# Altium PCB dev-board.PcbDoc
Units mm, origin at the board's own origin, x right, y up, seen from the top; angles counter-clockwise.
Board outline 320 x 150 mm, 2 copper layers (Top Layer, Bottom Layer); 200 components, 128 nets, 764 pads, 0 vias.
Unrouted connection lines stored in the file: 345.
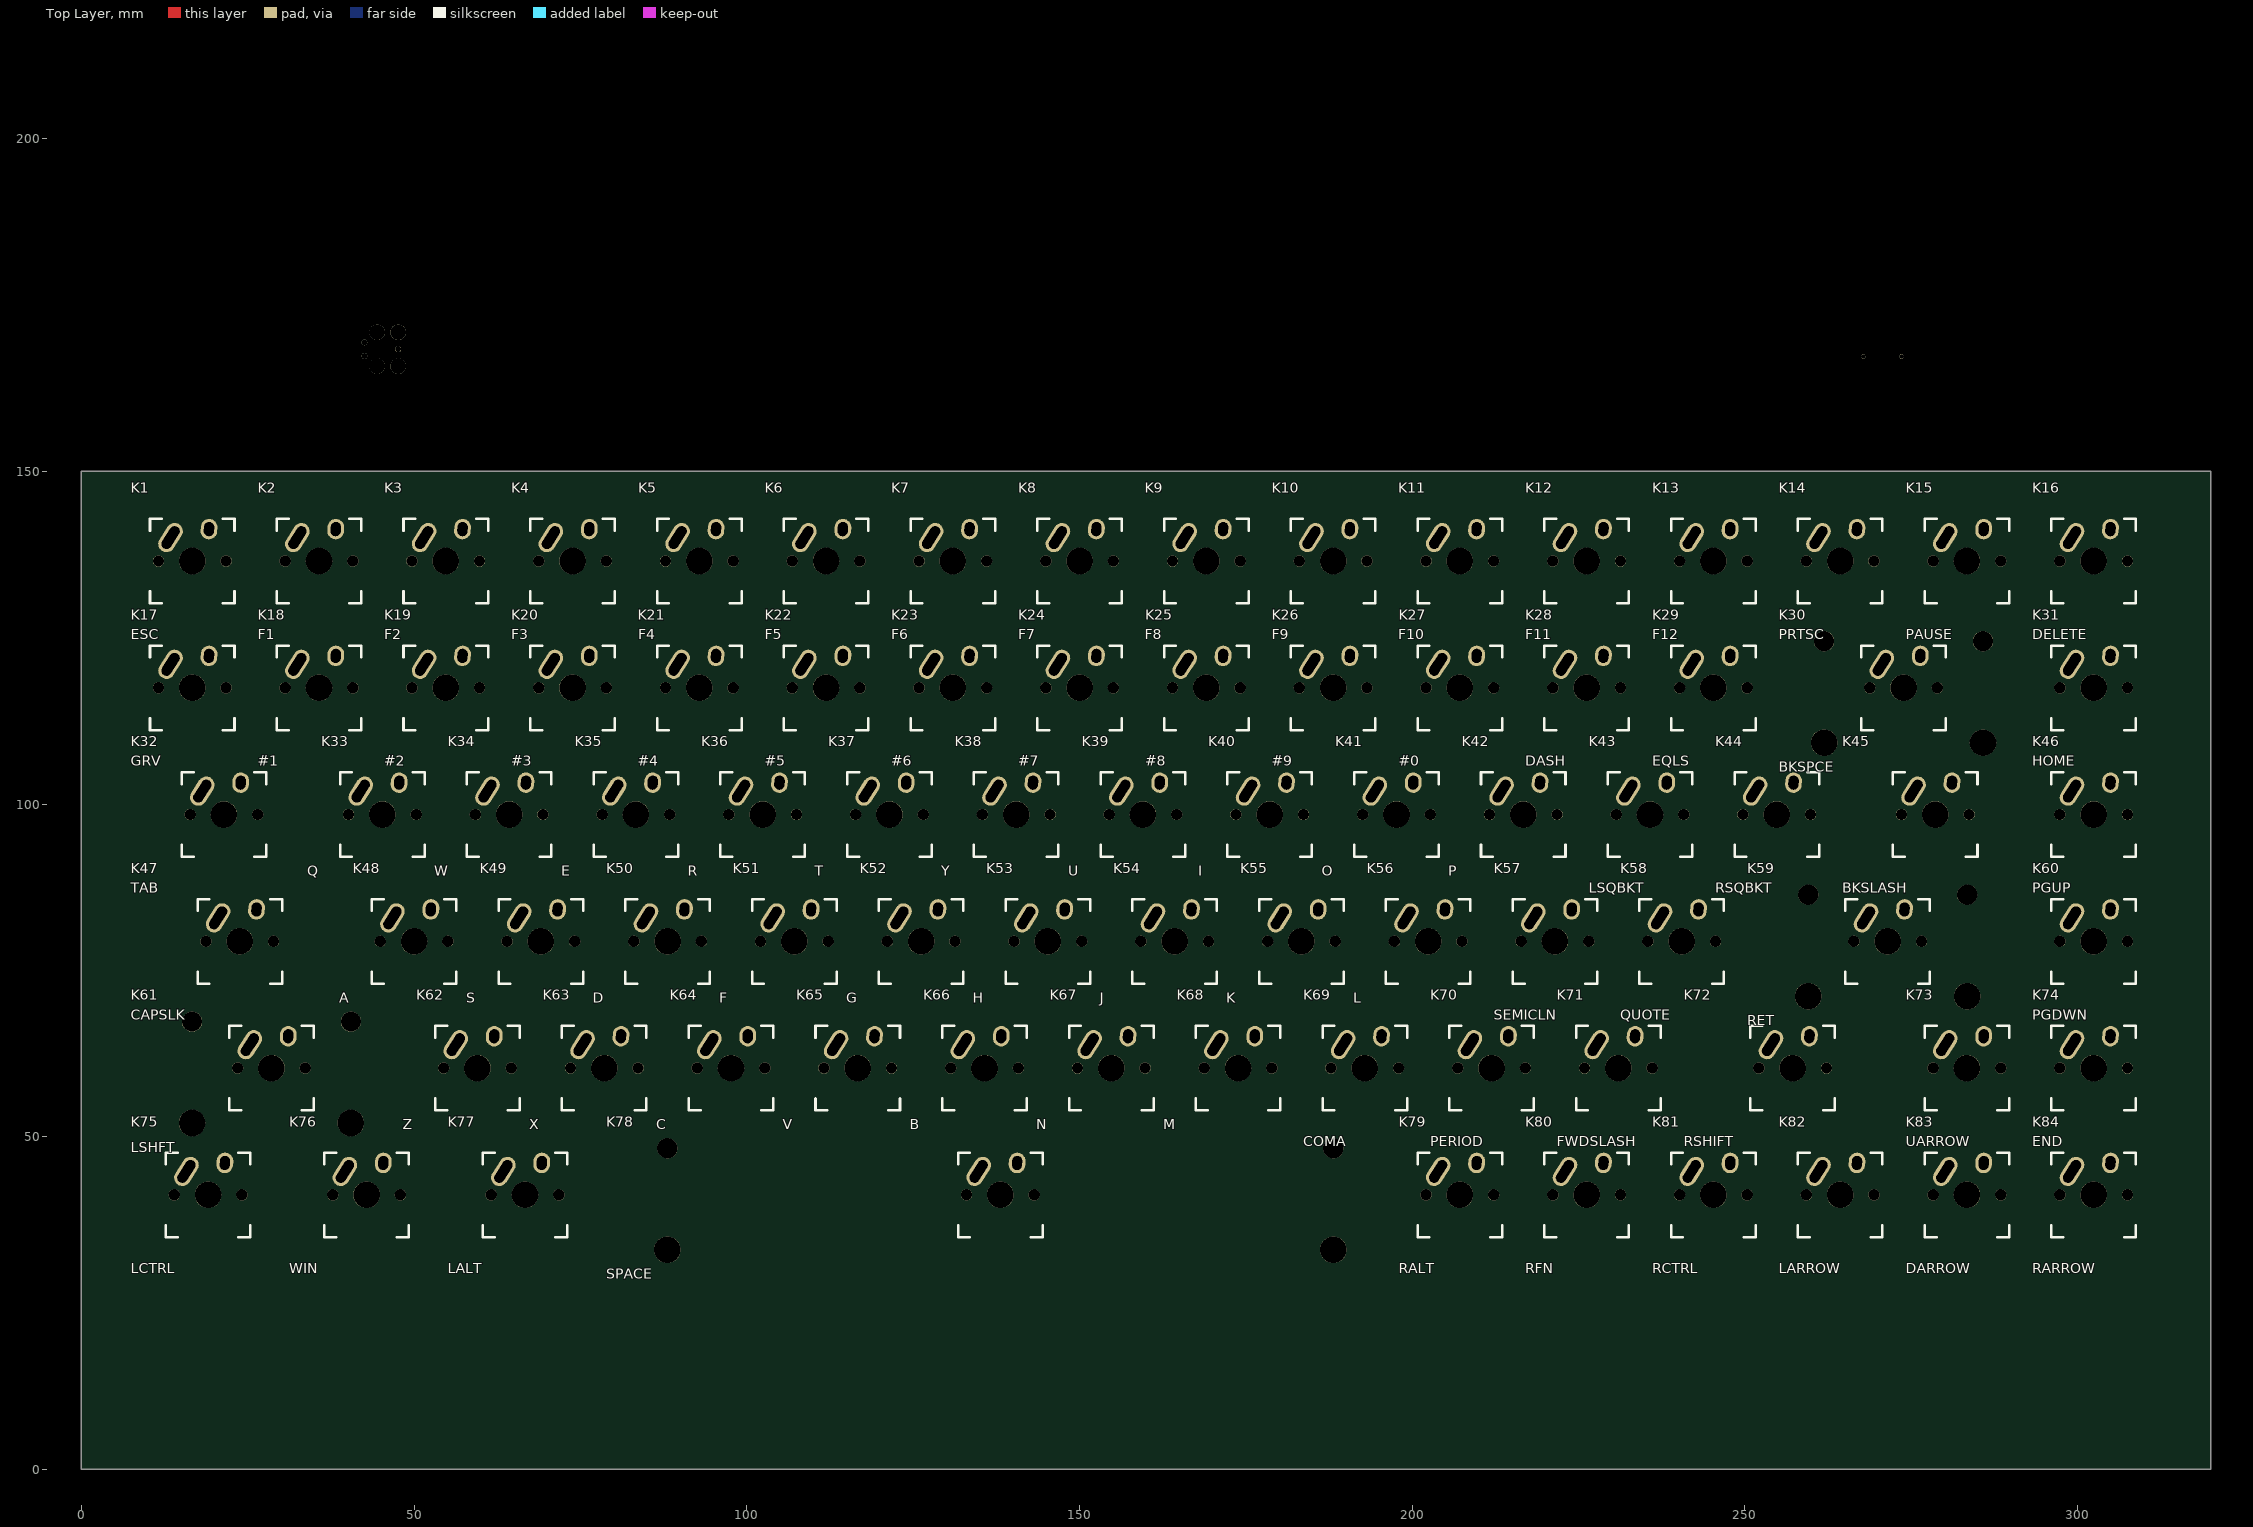
[diagram p0: Top Layer view]
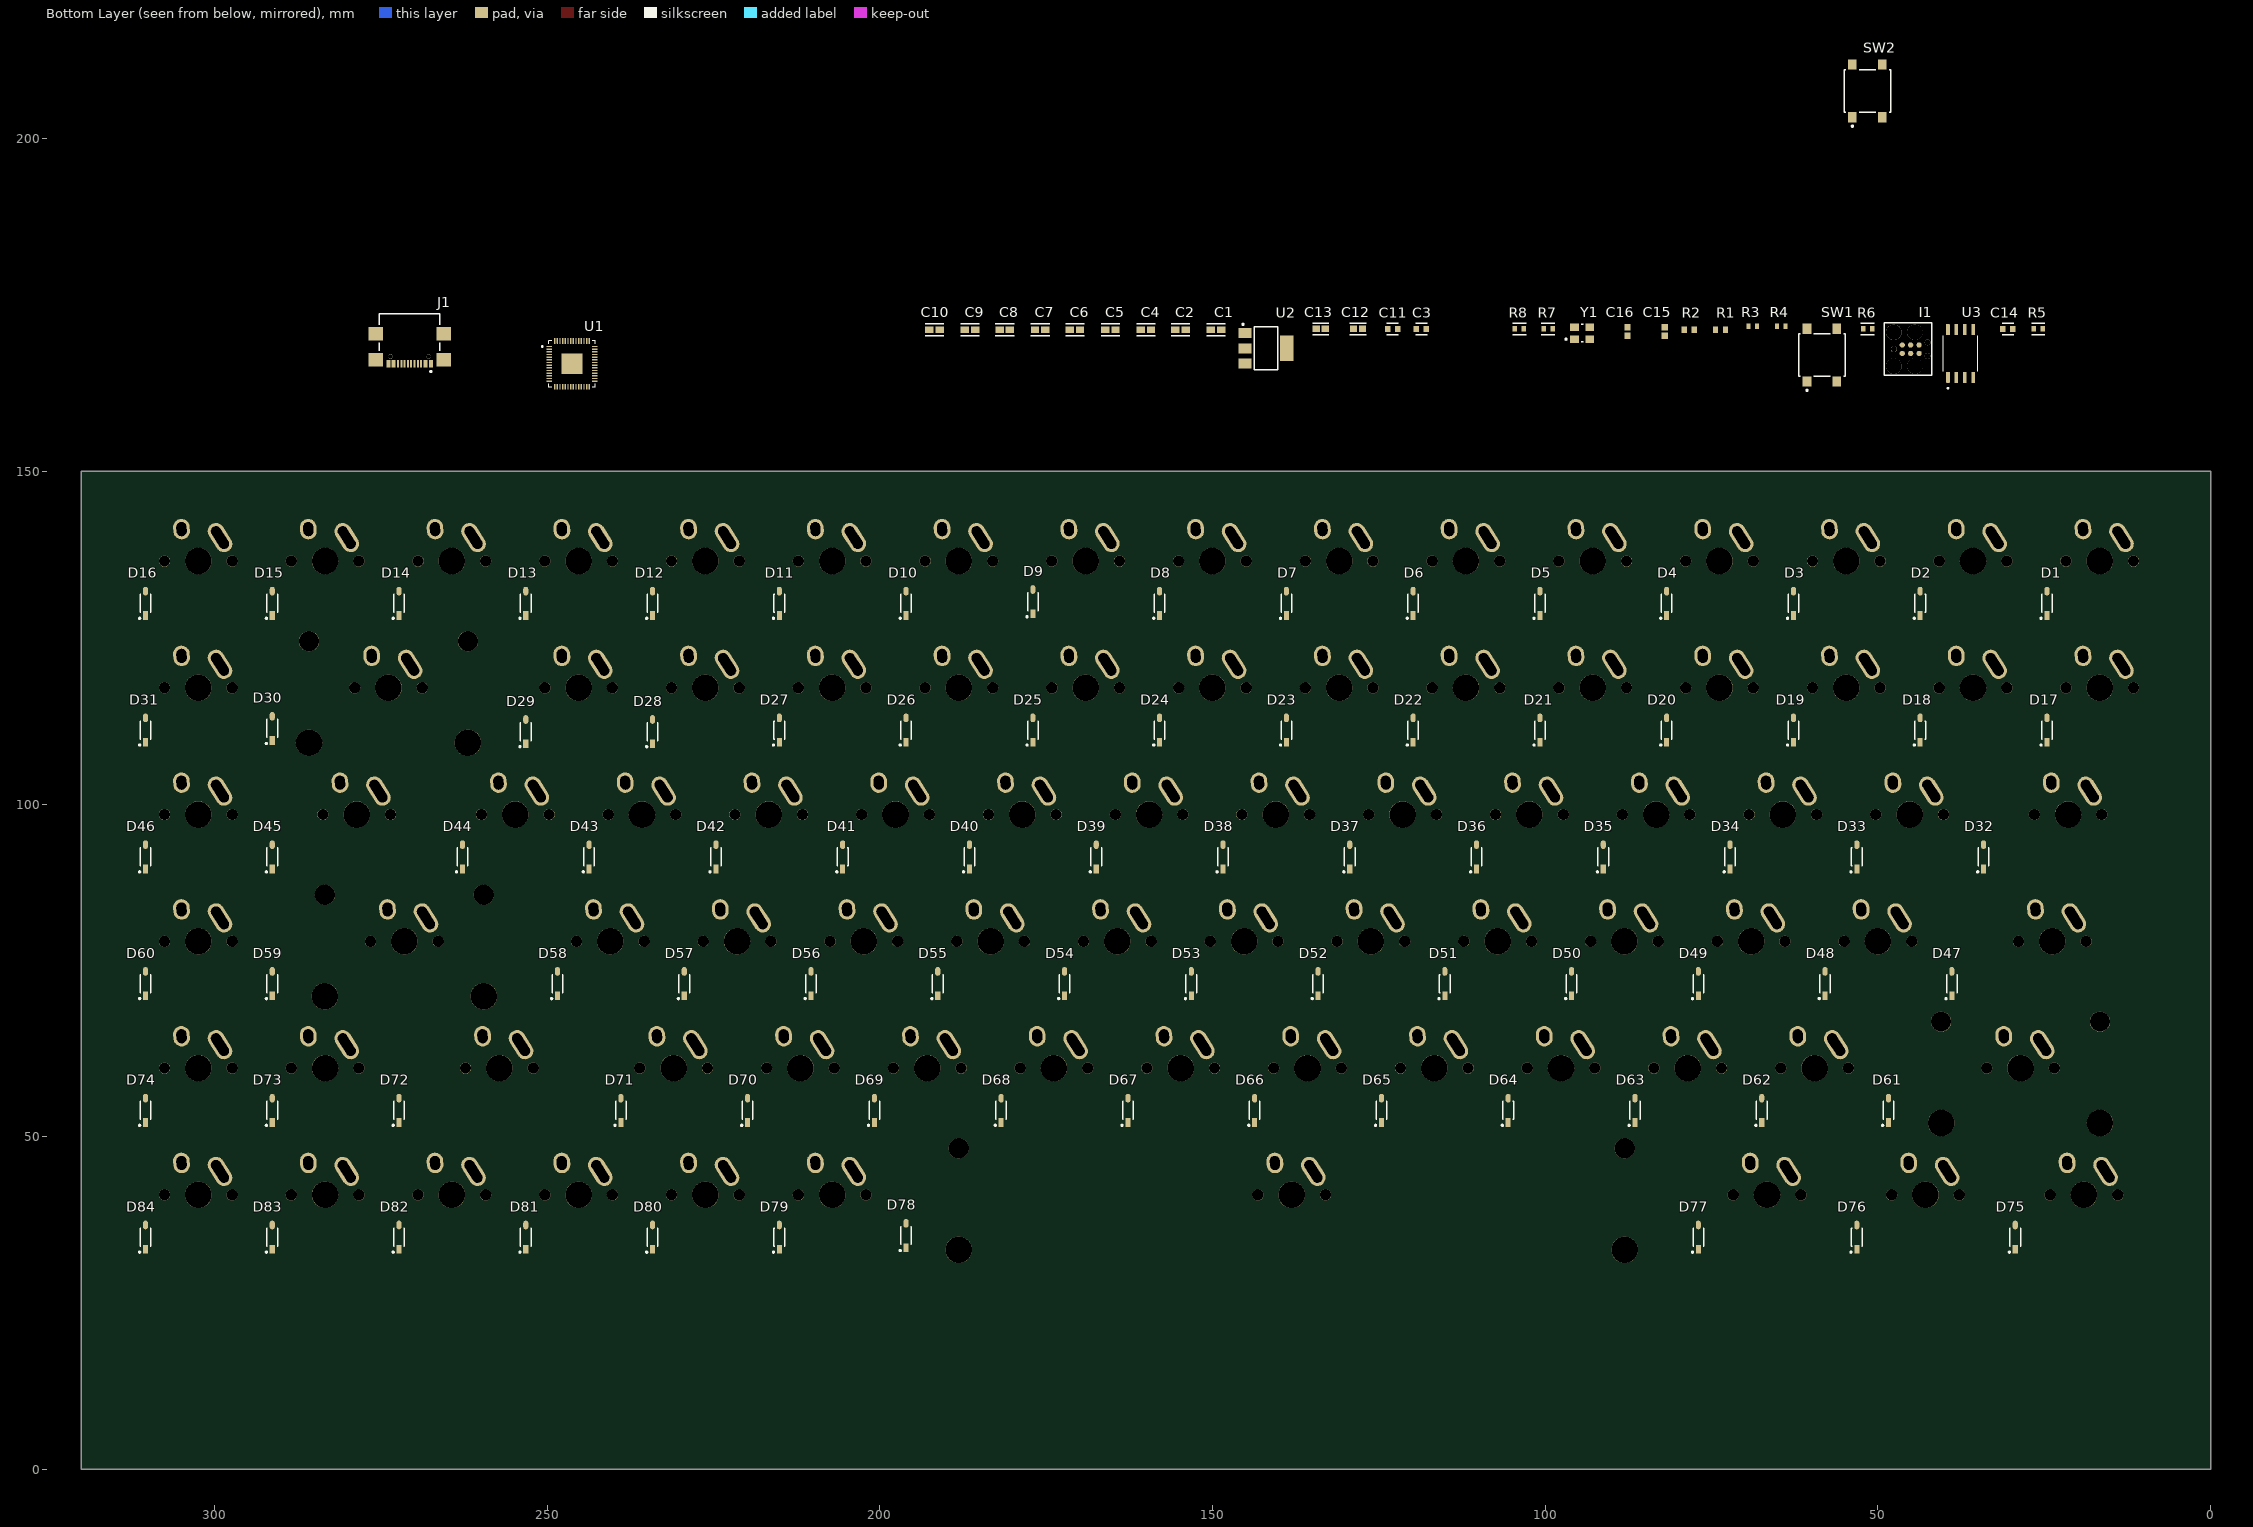
[diagram p1: Bottom Layer view, seen from below]

## Layer stack, top to bottom
Top Solder: solder mask 0.0102, Solder Resist, Dk 3.5
Top Layer: signal copper 0.0356
Dielectric 1: dielectric 0.32, FR-4, Dk 4.8
Bottom Layer: signal copper 0.0356
Bottom Solder: solder mask 0.0102, Solder Resist, Dk 3.5

## Board outline
0,0 320,0 320,150 0,150

## Design rules (kind name [scope] priority, off if disabled: settings)
Clearance [All] p1: gap=0.254 ignorepadtopadclearanceinfootprint=FALSE except(0: Arc-Hole Track-Hole SMDPad-Hole THPad-Hole Via-Hole Fill-Hole Poly-Hole Region-Hole Text-Hole)
PolygonConnect [All] p1: connectstyle=Relief reliefconductorwidth=0.254 reliefentries=4 polygonreliefangle="90 Angle" airgapwidth=0.254
RoutingVias [All] p1: holewidth=0.711 width=1.27 viastyle="Through Hole" minholewidth=0.711 minwidth=1.27 maxholewidth=0.711 maxwidth=1.27
SolderMaskExpansion [All] p1: expansion=0.102 istentingtop=FALSE
Width [All] p1: maxlimit=0.254 minlimit=0.254 preferedwidth=0.254
30 further rules are at their usual default settings.

## Classes and differential pairs
component class KeyMatrix: D1 D2 D3 D4 D5 D6 D7 D8 D9 D10 D11 D12 D13 D14 D15 D16 D17 D18 D19 D20 D21 D22 D23 D24 D25 D26 D27 D28 D29 D30 D31 D32 D33 D34 D35 D36 D37 D38 D39 D40 D41 D42 D43 D44 D45 D46 D47 D48 D49 D50 D51 D52 D53 D54 D55 D56 D57 D58 D59 D60 D61 D62 D63 D64 D65 D66 D67 D68 D69 D70 D71 D72 D73 D74 D75 D76 D77 D78 D79 D80 D81 D82 D83 D84 K1 K2 K3 K4 K5 K6 K7 K8 K9 K10 K11 K12 K13 K14 K15 K16 K17 K18 K19 K20 K21 K22 K23 K24 K25 K26 K27 K28 K29 K30 K31 K32 K33 K34 K35 K36 K37 K38 K39 K40 K41 K42 K43 K44 K45 K46 K47 K48 K49 K50 K51 K52 K53 K54 K55 K56 K57 K58 K59 K60 K61 K62 K63 K64 K65 K66 K67 K68 K69 K70 K71 K72 K73 K74 K75 K76 K77 K78 K79 K80 K81 K82 K83 K84
component class dev-board: C1 C2 C3 C4 C5 C6 C7 C8 C9 C10 C11 C12 C13 C14 C15 C16 I1 J1 R1 R2 R3 R4 R5 R6 R7 R8 SW1 SW2 U1 U2 U3 Y1

## Components (designator, comment, footprint, x,y, rotation, side; value= is the part's Value field where it differs from the comment)
C1 "100nF" FP-CC0603-DA-IPC_A 149.479,171.278 r180 bottom
C2 "100nF" FP-CC0603-DA-IPC_A 154.813,171.278 r180 bottom
C3 "1uF" FP-CC0603-DA-MFG 118.618,171.405 r180 bottom value="1 uF"
C4 "100nF" FP-CC0603-DA-IPC_A 160.02,171.278 r180 bottom
C5 "100nF" FP-CC0603-DA-IPC_A 165.354,171.278 r180 bottom
C6 "100nF" FP-CC0603-DA-IPC_A 170.688,171.278 r180 bottom
C7 "100nF" FP-CC0603-DA-IPC_A 175.895,171.278 r180 bottom
C8 "100nF" FP-CC0603-DA-IPC_A 181.229,171.278 r180 bottom
C9 "100nF" FP-CC0603-DA-IPC_A 186.436,171.278 r180 bottom
C10 "100nF" FP-CC0603-DA-IPC_A 191.77,171.278 r180 bottom
C11 "1uF" FP-CC0603-DA-MFG 122.936,171.405 r180 bottom value="1 uF"
C12 "10uF" FP-CC0603-0_15-0_95-IPC_B 128.143,171.405 r180 bottom
C13 "10uF" FP-CC0603-0_15-0_95-IPC_B 133.731,171.405 r180 bottom
C14 "10nF" FP-CC0603-DA-MFG 30.48,171.405 r180 bottom value="10 nF"
C15 "12pF" CAPC1608X90X40NL10T20 82.042,171.024 r90 bottom
C16 "12pF" CAPC1608X90X40NL10T20 87.63,171.024 r90 bottom
D1 "" FP-SOD-123-IPC_A 24.606,130.175 r90 bottom
D2 "" FP-SOD-123-IPC_A 43.656,130.175 r90 bottom
D3 "" FP-SOD-123-IPC_A 62.706,130.175 r90 bottom
D4 "" FP-SOD-123-IPC_A 81.756,130.175 r90 bottom
D5 "" FP-SOD-123-IPC_A 100.806,130.175 r90 bottom
D6 "" FP-SOD-123-IPC_A 119.856,130.175 r90 bottom
D7 "" FP-SOD-123-IPC_A 138.906,130.175 r90 bottom
D8 "" FP-SOD-123-IPC_A 157.956,130.175 r90 bottom
D9 "" FP-SOD-123-IPC_A 177.006,130.413 r90 bottom
D10 "" FP-SOD-123-IPC_A 196.056,130.175 r90 bottom
D11 "" FP-SOD-123-IPC_A 215.106,130.175 r90 bottom
D12 "" FP-SOD-123-IPC_A 234.156,130.175 r90 bottom
D13 "" FP-SOD-123-IPC_A 253.206,130.175 r90 bottom
D14 "" FP-SOD-123-IPC_A 272.256,130.175 r90 bottom
D15 "" FP-SOD-123-IPC_A 291.306,130.175 r90 bottom
D16 "" FP-SOD-123-IPC_A 310.356,130.175 r90 bottom
D17 "" FP-SOD-123-IPC_A 24.606,111.125 r90 bottom
D18 "" FP-SOD-123-IPC_A 43.656,111.125 r90 bottom
D19 "" FP-SOD-123-IPC_A 62.706,111.125 r90 bottom
D20 "" FP-SOD-123-IPC_A 81.756,111.125 r90 bottom
D21 "" FP-SOD-123-IPC_A 100.806,111.125 r90 bottom
D22 "" FP-SOD-123-IPC_A 119.856,111.125 r90 bottom
D23 "" FP-SOD-123-IPC_A 138.906,111.125 r90 bottom
D24 "" FP-SOD-123-IPC_A 157.956,111.125 r90 bottom
D25 "" FP-SOD-123-IPC_A 177.006,111.125 r90 bottom
D26 "" FP-SOD-123-IPC_A 196.056,111.125 r90 bottom
D27 "" FP-SOD-123-IPC_A 215.106,111.125 r90 bottom
D28 "" FP-SOD-123-IPC_A 234.156,110.887 r90 bottom
D29 "" FP-SOD-123-IPC_A 253.206,110.887 r90 bottom
D30 "" FP-SOD-123-IPC_A 291.306,111.363 r90 bottom
D31 "" FP-SOD-123-IPC_A 310.356,111.125 r90 bottom
D32 "" FP-SOD-123-IPC_A 34.131,92.075 r90 bottom
D33 "" FP-SOD-123-IPC_A 53.181,92.075 r90 bottom
D34 "" FP-SOD-123-IPC_A 72.231,92.075 r90 bottom
D35 "" FP-SOD-123-IPC_A 91.281,92.075 r90 bottom
D36 "" FP-SOD-123-IPC_A 110.331,92.075 r90 bottom
D37 "" FP-SOD-123-IPC_A 129.381,92.075 r90 bottom
D38 "" FP-SOD-123-IPC_A 148.431,92.075 r90 bottom
D39 "" FP-SOD-123-IPC_A 167.481,92.075 r90 bottom
D40 "" FP-SOD-123-IPC_A 186.531,92.075 r90 bottom
D41 "" FP-SOD-123-IPC_A 205.581,92.075 r90 bottom
D42 "" FP-SOD-123-IPC_A 224.631,92.075 r90 bottom
D43 "" FP-SOD-123-IPC_A 243.681,92.075 r90 bottom
D44 "" FP-SOD-123-IPC_A 262.731,92.075 r90 bottom
D45 "" FP-SOD-123-IPC_A 291.306,92.075 r90 bottom
D46 "" FP-SOD-123-IPC_A 310.356,92.075 r90 bottom
D47 "" FP-SOD-123-IPC_A 38.894,73.025 r90 bottom
D48 "" FP-SOD-123-IPC_A 57.944,73.025 r90 bottom
D49 "" FP-SOD-123-IPC_A 76.994,73.025 r90 bottom
D50 "" FP-SOD-123-IPC_A 96.044,73.025 r90 bottom
D51 "" FP-SOD-123-IPC_A 115.094,73.025 r90 bottom
D52 "" FP-SOD-123-IPC_A 134.144,73.025 r90 bottom
D53 "" FP-SOD-123-IPC_A 153.194,73.025 r90 bottom
D54 "" FP-SOD-123-IPC_A 172.244,73.025 r90 bottom
D55 "" FP-SOD-123-IPC_A 191.294,73.025 r90 bottom
D56 "" FP-SOD-123-IPC_A 210.344,73.025 r90 bottom
D57 "" FP-SOD-123-IPC_A 229.394,73.025 r90 bottom
D58 "" FP-SOD-123-IPC_A 248.444,73.025 r90 bottom
D59 "" FP-SOD-123-IPC_A 291.306,73.025 r90 bottom
D60 "" FP-SOD-123-IPC_A 310.356,73.025 r90 bottom
D61 "" FP-SOD-123-IPC_A 48.419,53.975 r90 bottom
D62 "" FP-SOD-123-IPC_A 67.469,53.975 r90 bottom
D63 "" FP-SOD-123-IPC_A 86.519,53.975 r90 bottom
D64 "" FP-SOD-123-IPC_A 105.569,53.975 r90 bottom
D65 "" FP-SOD-123-IPC_A 124.619,53.975 r90 bottom
D66 "" FP-SOD-123-IPC_A 143.669,53.975 r90 bottom
D67 "" FP-SOD-123-IPC_A 162.719,53.975 r90 bottom
D68 "" FP-SOD-123-IPC_A 181.769,53.975 r90 bottom
D69 "" FP-SOD-123-IPC_A 200.819,53.975 r90 bottom
D70 "" FP-SOD-123-IPC_A 219.869,53.975 r90 bottom
D71 "" FP-SOD-123-IPC_A 238.919,53.975 r90 bottom
D72 "" FP-SOD-123-IPC_A 272.256,53.975 r90 bottom
D73 "" FP-SOD-123-IPC_A 291.306,53.975 r90 bottom
D74 "" FP-SOD-123-IPC_A 310.356,53.975 r90 bottom
D75 "" FP-SOD-123-IPC_A 29.369,34.925 r90 bottom
D76 "" FP-SOD-123-IPC_A 53.181,34.925 r90 bottom
D77 "" FP-SOD-123-IPC_A 76.994,34.925 r90 bottom
D78 "" FP-SOD-123-IPC_A 196.056,35.163 r90 bottom
D79 "" FP-SOD-123-IPC_A 215.106,34.925 r90 bottom
D80 "" FP-SOD-123-IPC_A 234.156,34.925 r90 bottom
D81 "" FP-SOD-123-IPC_A 253.206,34.925 r90 bottom
D82 "" FP-SOD-123-IPC_A 272.256,34.925 r90 bottom
D83 "" FP-SOD-123-IPC_A 291.306,34.925 r90 bottom
D84 "" FP-SOD-123-IPC_A 310.356,34.925 r90 bottom
I1 "ICSP" TC2030-MCP 47.625,168.357 r180 bottom
J1 "USB4110-GF-A" FP-USB4110-GF-A-MFG 270.669,169.862 r0 bottom
K1 "ESC" Mx_Alps_100 16.669,136.525 r0 top value=KEYSW
K2 "F1" Mx_Alps_100 35.719,136.525 r0 top value=KEYSW
K3 "F2" Mx_Alps_100 54.769,136.525 r0 top value=KEYSW
K4 "F3" Mx_Alps_100 73.819,136.525 r0 top value=KEYSW
K5 "F4" Mx_Alps_100 92.869,136.525 r0 top value=KEYSW
K6 "F5" Mx_Alps_100 111.919,136.525 r0 top value=KEYSW
K7 "F6" Mx_Alps_100 130.969,136.525 r0 top value=KEYSW
K8 "F7" Mx_Alps_100 150.019,136.525 r0 top value=KEYSW
K9 "F8" Mx_Alps_100 169.069,136.525 r0 top value=KEYSW
K10 "F9" Mx_Alps_100 188.119,136.525 r0 top value=KEYSW
K11 "F10" Mx_Alps_100 207.169,136.525 r0 top value=KEYSW
K12 "F11" Mx_Alps_100 226.219,136.525 r0 top value=KEYSW
K13 "F12" Mx_Alps_100 245.269,136.525 r0 top value=KEYSW
K14 "PRTSC" Mx_Alps_100 264.319,136.525 r0 top value=KEYSW
K15 "PAUSE" Mx_Alps_100 283.369,136.525 r0 top value=KEYSW
K16 "DELETE" Mx_Alps_100 302.419,136.525 r0 top value=KEYSW
K17 "GRV" Mx_Alps_100 16.669,117.475 r0 top value=KEYSW
K18 "#1" Mx_Alps_100 35.719,117.475 r0 top value=KEYSW
K19 "#2" Mx_Alps_100 54.769,117.475 r0 top value=KEYSW
K20 "#3" Mx_Alps_100 73.819,117.475 r0 top value=KEYSW
K21 "#4" Mx_Alps_100 92.869,117.475 r0 top value=KEYSW
K22 "#5" Mx_Alps_100 111.919,117.475 r0 top value=KEYSW
K23 "#6" Mx_Alps_100 130.969,117.475 r0 top value=KEYSW
K24 "#7" Mx_Alps_100 150.019,117.475 r0 top value=KEYSW
K25 "#8" Mx_Alps_100 169.069,117.475 r0 top value=KEYSW
K26 "#9" Mx_Alps_100 188.119,117.475 r0 top value=KEYSW
K27 "#0" Mx_Alps_100 207.169,117.475 r0 top value=KEYSW
K28 "DASH" Mx_Alps_100 226.219,117.475 r0 top value=KEYSW
K29 "EQLS" Mx_Alps_100 245.269,117.475 r0 top value=KEYSW
K30 "BKSPCE" Mx_Alps_200 273.844,117.475 r0 top value=KEYSW
K31 "HOME" Mx_Alps_100 302.419,117.475 r0 top value=KEYSW
K32 "TAB" Mx_Alps_150 21.431,98.425 r0 top value=KEYSW
K33 "Q" Mx_Alps_100 45.244,98.425 r0 top value=KEYSW
K34 "W" Mx_Alps_100 64.294,98.425 r0 top value=KEYSW
K35 "E" Mx_Alps_100 83.344,98.425 r0 top value=KEYSW
K36 "R" Mx_Alps_100 102.394,98.425 r0 top value=KEYSW
K37 "T" Mx_Alps_100 121.444,98.425 r0 top value=KEYSW
K38 "Y" Mx_Alps_100 140.494,98.425 r0 top value=KEYSW
K39 "U" Mx_Alps_100 159.544,98.425 r0 top value=KEYSW
K40 "I" Mx_Alps_100 178.594,98.425 r0 top value=KEYSW
K41 "O" Mx_Alps_100 197.644,98.425 r0 top value=KEYSW
K42 "P" Mx_Alps_100 216.694,98.425 r0 top value=KEYSW
K43 "LSQBKT" Mx_Alps_100 235.744,98.425 r0 top value=KEYSW
K44 "RSQBKT" Mx_Alps_100 254.794,98.425 r0 top value=KEYSW
K45 "BKSLASH" Mx_Alps_150 278.606,98.425 r0 top value=KEYSW
K46 "PGUP" Mx_Alps_100 302.419,98.425 r0 top value=KEYSW
K47 "CAPSLK" Mx_Alps_175 23.812,79.375 r0 top value=KEYSW
K48 "A" Mx_Alps_100 50.006,79.375 r0 top value=KEYSW
K49 "S" Mx_Alps_100 69.056,79.375 r0 top value=KEYSW
K50 "D" Mx_Alps_100 88.106,79.375 r0 top value=KEYSW
K51 "F" Mx_Alps_100 107.156,79.375 r0 top value=KEYSW
K52 "G" Mx_Alps_100 126.206,79.375 r0 top value=KEYSW
K53 "H" Mx_Alps_100 145.256,79.375 r0 top value=KEYSW
K54 "J" Mx_Alps_100 164.306,79.375 r0 top value=KEYSW
K55 "K" Mx_Alps_100 183.356,79.375 r0 top value=KEYSW
K56 "L" Mx_Alps_100 202.406,79.375 r0 top value=KEYSW
K57 "SEMICLN" Mx_Alps_100 221.456,79.375 r0 top value=KEYSW
K58 "QUOTE" Mx_Alps_100 240.506,79.375 r0 top value=KEYSW
K59 "RET" Mx_Alps_225 271.462,79.375 r0 top value=KEYSW
K60 "PGDWN" Mx_Alps_100 302.419,79.375 r0 top value=KEYSW
K61 "LSHFT" Mx_Alps_225 28.575,60.325 r0 top value=KEYSW
K62 "Z" Mx_Alps_100 59.531,60.325 r0 top value=KEYSW
K63 "X" Mx_Alps_100 78.581,60.325 r0 top value=KEYSW
K64 "C" Mx_Alps_100 97.631,60.325 r0 top value=KEYSW
K65 "V" Mx_Alps_100 116.681,60.325 r0 top value=KEYSW
K66 "B" Mx_Alps_100 135.731,60.325 r0 top value=KEYSW
K67 "N" Mx_Alps_100 154.781,60.325 r0 top value=KEYSW
K68 "M" Mx_Alps_100 173.831,60.325 r0 top value=KEYSW
K69 "COMA" Mx_Alps_100 192.881,60.325 r0 top value=KEYSW
K70 "PERIOD" Mx_Alps_100 211.931,60.325 r0 top value=KEYSW
K71 "FWDSLASH" Mx_Alps_100 230.981,60.325 r0 top value=KEYSW
K72 "RSHIFT" Mx_Alps_175 257.175,60.325 r0 top value=KEYSW
K73 "UARROW" Mx_Alps_100 283.369,60.325 r0 top value=KEYSW
K74 "END" Mx_Alps_100 302.419,60.325 r0 top value=KEYSW
K75 "LCTRL" Mx_Alps_125 19.05,41.275 r0 top value=KEYSW
K76 "WIN" Mx_Alps_125 42.862,41.275 r0 top value=KEYSW
K77 "LALT" Mx_Alps_125 66.675,41.275 r0 top value=KEYSW
K78 "SPACE" Mx_Alps_625 138.112,41.275 r0 top value=KEYSW
K79 "RALT" Mx_Alps_100 207.169,41.275 r0 top value=KEYSW
K80 "RFN" Mx_Alps_100 226.219,41.275 r0 top value=KEYSW
K81 "RCTRL" Mx_Alps_100 245.269,41.275 r0 top value=KEYSW
K82 "LARROW" Mx_Alps_100 264.319,41.275 r0 top value=KEYSW
K83 "DARROW" Mx_Alps_100 283.369,41.275 r0 top value=KEYSW
K84 "RARROW" Mx_Alps_100 302.419,41.275 r0 top value=KEYSW
R1 "5.1K" RESC1608X55X25ML10T15 73.66,171.278 r180 bottom
R2 "5.1K" RESC1608X55X25ML10T15 78.359,171.278 r180 bottom
R3 "27.4" RESC1608X55X25LL10T15 68.834,171.786 r180 bottom
R4 "27.4" RESC1608X55X25LL10T15 64.516,171.786 r180 bottom
R5 "1K" FP-RC0603-0_55-IPC_C 25.908,171.405 r180 bottom
R6 "10K" FP-RC0603-0_55-IPC_C 51.562,171.405 r180 bottom
R7 "1K" FP-RC0603-0_55-IPC_C 99.568,171.405 r180 bottom
R8 "10K" FP-RC0603-0_55-IPC_C 103.886,171.405 r180 bottom
SW1 "B3S-1000P" FP-B3S-1000P-MFG 58.42,167.468 r90 bottom
SW2 "B3S-1000P" FP-B3S-1000P-MFG 51.594,207.169 r90 bottom
U1 "RP2040" QFN40P700X700X90-57N 246.256,166.154 r180 bottom
U2 "NCP1117ST33T3G" ONSC-SOT-223-4-318H-01_A_V 141.986,168.484 r180 bottom
U3 "AT25SF128A-SHB-T" SOIC127P790X216-8N 37.592,167.722 r90 bottom
Y1 "" FP-ECX-33Q-MFG 94.448,170.77 r180 bottom

## Footprints (in the part's own frame and the unit in brackets; to place one, negate y for a bottom-side part, rotate by r counter-clockwise, add the part's x,y. Pads: shape width x height; smd on the part's side, far side on the other; paste and mask are expansions set on the pad)
CAPC1608X90X40NL10T20 [mm] "Chip Capacitor, 2-Leads, Body 1.7x0.9mm, IPC Medium Density"
  rect 0.95x0.95 smd: 1(-0.625,0) 2(0.625,0)
  body extent -0.85,-0.45 0.85,0.45, height 0.9
FP-B3S-1000P-MFG [mm]
  rect 1.55x1.3 smd paste+0 mask+0: 1(-3.975,2.25) 2(3.975,2.25) 3(-3.975,-2.25) 4(3.975,-2.25)
  silkscreen extent -5.42,-3.5 3.2,3.5, body extent -4.5,-3.3 4.5,3.3, height 4.7
FP-CC0603-0_15-0_95-IPC_B [mm]
  rect 1.106x0.958 smd paste+0 mask+0: 1(-0.676,0) 2(0.676,0)
  silkscreen extent -1.23,-0.88 1.23,0.88, body extent -0.8,-0.4 0.8,0.4, height 0.95
FP-CC0603-DA-IPC_A [mm]
  rect 1.258x1.012 smd paste+0 mask+0: 1(-0.777,0) 2(0.777,0)
  silkscreen extent -1.41,-0.91 1.41,0.91, body extent -0.8,-0.4 0.8,0.4, height 0.9
FP-CC0603-DA-MFG [mm]
  rect 0.8x0.9 smd paste+0 mask+0: 1(-0.75,0) 2(0.75,0)
  silkscreen extent -0.85,-0.85 0.85,0.85, body extent -0.8,-0.4 0.8,0.4, height 0.9
FP-ECX-33Q-MFG [mm]
  rect 1.3x1.1 smd paste+0 mask+0: 1(-1.15,-0.9) 2(1.15,-0.9) 3(1.15,0.9) 4(-1.15,0.9)
  silkscreen extent -2.55,-1.3 0.13,1.3, body extent -1.6,-1.25 1.6,1.25, height 0.8
FP-RC0603-0_55-IPC_C [mm]
  rect 0.659x0.812 smd paste+0 mask+0: 1(-0.677,0) 2(0.677,0)
  silkscreen extent -1.01,-0.85 1.01,0.85, body extent -0.8,-0.4 0.8,0.4, height 0.55
FP-SOD-123-IPC_A [mm]
  rect 1.308x0.762 smd paste+0 mask+0: 1(-1.825,0)
  rrect100% 1.308x0.762 smd paste+0 mask+0: 2(1.825,0)
  silkscreen extent -2.39,-0.8 1.35,1.01, body extent -1.85,-0.8 1.85,0.8, height 1.35
FP-USB4110-GF-A-MFG [mm]
  rect 2.18x2 smd paste+0 mask+0: 1(-5.11,3.105) 2(5.11,3.105) 3(-5.11,-0.825) 4(5.11,-0.825)
  rect 0.6x1.15 smd paste+0 mask+0: A1-B12(-3.2,3.68) A4-B9(-2.4,3.68) B1-A12(3.2,3.68) B4-A9(2.4,3.68)
  rect 0.3x1.15 smd paste+0 mask+0: A5(-1.25,3.68) A6(-0.25,3.68) A7(0.25,3.68) A8(1.25,3.68) B5(1.75,3.68) B6(0.75,3.68) B7(-0.75,3.68) B8(-1.75,3.68)
  round 0.65 hole 0.65 unplated paste-1000 mask+0: ""(-2.89,2.605) ""(2.89,2.605)
  silkscreen extent -4.57,-3.83 4.57,4.99, body extent -5.65,-3.67 5.65,4.01, height 3.21
Mx_Alps_100 [mm]
  rrect100% 2.5x4.75 hole 3.75 slot 1.5 at 147.5 deg rot 147.5: 1(-3.255,3.52)
  rrect100% 2.5x3.08 hole 2.08 slot 1.5 at 176.1 deg rot 176.1: 2(2.52,4.79)
  round 3.988 hole 3.988: Un1(0,0)
  round 1.702 hole 1.702: Un2(-5.08,0) Un3(5.08,0)
  silkscreen extent -6.35,-6.35 6.35,6.35
Mx_Alps_125 [mm]
  rrect100% 2.5x4.75 hole 3.75 slot 1.5 at 147.5 deg rot 147.5: 1(-3.255,3.52)
  rrect100% 2.5x3.08 hole 2.08 slot 1.5 at 176.1 deg rot 176.1: 2(2.52,4.79)
  round 3.988 hole 3.988: Un1(0,0)
  round 1.702 hole 1.702: Un2(-5.08,0) Un3(5.08,0)
  silkscreen extent -6.35,-6.35 6.35,6.35
Mx_Alps_150 [mm]
  rrect100% 2.5x4.75 hole 3.75 slot 1.5 at 147.5 deg rot 147.5: 1(-3.255,3.52)
  rrect100% 2.5x3.08 hole 2.08 slot 1.5 at 176.1 deg rot 176.1: 2(2.52,4.79)
  round 3.988 hole 3.988: Un1(0,0)
  round 1.702 hole 1.702: Un2(-5.08,0) Un3(5.08,0)
  silkscreen extent -6.35,-6.35 6.35,6.35
Mx_Alps_175 [mm]
  rrect100% 2.5x4.75 hole 3.75 slot 1.5 at 147.5 deg rot 147.5: 1(-3.255,3.52)
  rrect100% 2.5x3.08 hole 2.08 slot 1.5 at 176.1 deg rot 176.1: 2(2.52,4.79)
  round 3.988 hole 3.988: Un1(0,0)
  round 1.702 hole 1.702: Un2(-5.08,0) Un3(5.08,0)
  silkscreen extent -6.35,-6.35 6.35,6.35
Mx_Alps_200 [mil]
  rrect100% 98.43x187.01 hole 147.64 slot 59.06 at 147.5 deg rot 147.5: 1(-128.15,138.58)
  rrect100% 98.43x121.26 hole 81.89 slot 59.06 at 176.1 deg rot 176.1: 2(99.21,188.58)
  round 157 hole 157: Un1(0,0) Un6(-470,-325) Un7(470,-325)
  round 67 hole 67: Un2(-200,0) Un3(200,0)
  round 120 hole 120: Un4(-470,275) Un5(470,275)
  silkscreen extent -250,-250 250,250
Mx_Alps_225 [mil]
  rrect100% 98.43x187.01 hole 147.64 slot 59.06 at 147.5 deg rot 147.5: 1(-128.15,138.58)
  rrect100% 98.43x121.26 hole 81.89 slot 59.06 at 176.1 deg rot 176.1: 2(99.21,188.58)
  round 157 hole 157: Un1(0,0) Un6(-470,-325) Un7(470,-325)
  round 67 hole 67: Un2(-200,0) Un3(200,0)
  round 120 hole 120: Un4(-470,275) Un5(470,275)
  silkscreen extent -250,-250 250,250
Mx_Alps_625 [mil]
  rrect100% 98.43x187.01 hole 147.64 slot 59.06 at 147.5 deg rot 147.5: 1(-128.15,138.58)
  rrect100% 98.43x121.26 hole 81.89 slot 59.06 at 176.1 deg rot 176.1: 2(99.21,188.58)
  round 157 hole 157: Un1(0,0) Un6(-1970,-325) Un7(1970,-325)
  round 67 hole 67: Un2(-200,0) Un3(200,0)
  round 120 hole 120: Un4(-1970,275) Un5(1970,275)
  silkscreen extent -250,-250 250,250
ONSC-SOT-223-4-318H-01_A_V [mm] "SOT223, 4-Leads, Body 6.5x3.5mm, Pitch 2.3mm"
  rect 2x1.5 smd: 1(-3.15,2.3) 2(-3.15,0) 3(-3.15,-2.3)
  rect 2x3.8 smd: 4(3.15,0)
  silkscreen extent -3.55,-3.25 1.75,3.72, body extent -1.75,-3.25 1.75,3.25, height 1.8
QFN40P700X700X90-57N [mm]
  rrect25% 0.84x0.2 smd: 1(-3.435,2.6) 2(-3.435,2.2) 3(-3.435,1.8) 4(-3.435,1.4) 5(-3.435,1) 6(-3.435,0.6) 7(-3.435,0.2) 8(-3.435,-0.2) 9(-3.435,-0.6) 10(-3.435,-1) 11(-3.435,-1.4) 12(-3.435,-1.8) 13(-3.435,-2.2) 14(-3.435,-2.6) 29(3.435,-2.6) 30(3.435,-2.2) 31(3.435,-1.8) 32(3.435,-1.4) 33(3.435,-1) 34(3.435,-0.6) 35(3.435,-0.2) 36(3.435,0.2) 37(3.435,0.6) 38(3.435,1) 39(3.435,1.4) 40(3.435,1.8) 41(3.435,2.2) 42(3.435,2.6)
  rrect25% 0.2x0.84 smd: 15(-2.6,-3.435) 16(-2.2,-3.435) 17(-1.8,-3.435) 18(-1.4,-3.435) 19(-1,-3.435) 20(-0.6,-3.435) 21(-0.2,-3.435) 22(0.2,-3.435) 23(0.6,-3.435) 24(1,-3.435) 25(1.4,-3.435) 26(1.8,-3.435) 27(2.2,-3.435) 28(2.6,-3.435) 43(2.6,3.435) 44(2.2,3.435) 45(1.8,3.435) 46(1.4,3.435) 47(1,3.435) 48(0.6,3.435) 49(0.2,3.435) 50(-0.2,3.435) 51(-0.6,3.435) 52(-1,3.435) 53(-1.4,3.435) 54(-1.8,3.435) 55(-2.2,3.435) 56(-2.6,3.435)
  rect 3.1x3.1 smd paste-0.57: 57(0,0)
  silkscreen extent -4.57,-3.5 3.5,3.5, body extent -3.5,-3.5 3.5,3.5, height 0.9
RESC1608X55X25LL10T15 [mm] "Chip Resistor, 2-Leads, Body 1.60x0.80mm, IPC High Density"
  rect 0.6x0.8 smd: 1(-0.65,0) 2(0.65,0)
  body extent -0.85,-0.45 0.85,0.45, height 0.55
RESC1608X55X25ML10T15 [mm] "Chip Resistor, 2-Leads, Body 1.60x0.80mm, IPC Low Density"
  rect 0.8x1 smd: 1(-0.75,0) 2(0.75,0)
  body extent -0.85,-0.45 0.85,0.45, height 0.55
SOIC127P790X216-8N [mm]
  rrect25% 1.65x0.58 smd: 1(-3.585,1.905) 2(-3.585,0.635) 3(-3.585,-0.635) 4(-3.585,-1.905) 5(3.585,-1.905) 6(3.585,-0.635) 7(3.585,0.635) 8(3.585,1.905)
  silkscreen extent -5.33,-2.62 2.65,2.62, body extent -3.99,-2.62 3.99,2.62, height 2.16
TC2030-MCP [mil]
  round 31 smd: 1(50,-25) 2(50,25) 3(100,-25) 4(100,25) 5(150,-25) 6(150,25)
  round 34 hole 35 unplated: A(0,0) B(200,40) C(200,-40)
  round 92 hole 93 unplated: D(0,-100) E(125,-100) F(0,100) G(125,100)
  silkscreen extent -55,-155 225,155

## Part data
C1 C2 C4 C5 C6 C7 C8 C9 C10: library part CMP-03422-001490-1, "CAP CER 0.1UF 50V X7R 0603", Case Code (Imperial)=0603, Case Code (Metric)=1608, Dielectric=X7R, Max Operating Temperature=125°C, Min Operating Temperature=-55°C, Resistor Type=Ceramic, Tolerance=5%, Voltage Rating=50V, Capacitance=100nF, Case/Package=0603, Construction=Flat, Depth=0.8mm, Halogen Free="Halogen Free", Height=0.8mm, Lead Free="Lead Free", Length=1.6mm, Mount="Surface Mount", Number of Pins=2, Packaging="Tape and Reel", Radiation Hardening=No, RoHS Compliant=Yes, Series=CC, Termination=SMD/SMT, Thickness=0.035inch, Voltage Rating (DC)=50V, Weight=7.1E-05oz, Width=0.031inch
C3 C11: library part CMP-1035-02737-2, "CAP CER 1UF 16V X5R 0603", Capacitance="1 uF", Manufacturer=YAGEO, Manufacturer Part Number=CC0603KRX5R7BB105, Package=CC0603-DA, Temperature="-55°C to +125°C", Temperature Characteristic=X5R, Temperature Coefficient=15%, Temperature Range High=+125°C, Temperature Range Low=-55°C, Tolerance=0.1, Voltage="16 V", Automotive=No, Category=Cap, ComponentLink2Description=Datasheet, ComponentLink2URL=http://www.yageo.com/documents/recent/UPY-GPHC_X7R_6.3V-to-50V_18.pdf, Device Class L1="Passive Components", Device Class L2=Capacitors, Device Class L3="Ceramic Capacitors", Digikey Description="CAP CER 1UF 16V X5R 0603", Footprint Url=http://www.yageo.com/exep/pages/download/literatures/UPY-C_GEN_24.pdf, Height=0.9mm, Lead Free=Yes, Material=Ceramic, Mouser Description="Multilayer Ceramic Capacitors MLCC - SMD/SMT 1.0uF 16V X5R 10%", Octopart=https://octopart.com/cc0603krx5r7bb105-yageo-8376530, RoHS=TRUE, Voltage Rating="16 V"
C12 C13: library part CMP-03422-001506-1, "CAP CER 10UF 6.3V X5R 0603", Case Code (Imperial)=0603, Case Code (Metric)=1608, Dielectric=X5R, Max Operating Temperature=85°C, Min Operating Temperature=-55°C, Resistor Type=Ceramic, Tolerance=20%, Voltage=4V, Voltage Rating=6.3V, Capacitance=10uF, Case/Package=0603, Construction=Flat, Depth=0.8mm, Halogen Free="Halogen Free", Height=0.8mm, Lead Free="Lead Free", Length=1.6mm, Mount="Surface Mount", Packaging="Tape and Reel", Radiation Hardening=No, RoHS Compliant=Yes, Series=CC, Termination=SMD/SMT, Thickness=0.035inch, Voltage Rating (DC)=6.3V, Weight=7.1E-05oz, Width=0.031inch
C14: library part CMP-2100-03600-2, "CAP CER 10000PF 50V X7R 0603", Capacitance="10 nF", Manufacturer=YAGEO, Manufacturer Part Number=CC0603KRX7R9BB103, Package=CC0603-DA, Temperature="-55°C to +125°C", Temperature Characteristic=X7R, Temperature Coefficient=15%, Temperature Range High=+125°C, Temperature Range Low=-55°C, Tolerance=0.1, Voltage="50 V", Automotive=No, Category=Cap, ComponentLink2Description=Datasheet, ComponentLink2URL=http://www.yageo.com/documents/recent/UPY-GPHC_X7R_6.3V-to-50V_18.pdf, Device Class L1="Passive Components", Device Class L2=Capacitors, Device Class L3="Ceramic Capacitors", Digikey Description="CAP CER 10000PF 50V X7R 0603", Footprint Url=http://www.yageo.com/exep/pages/download/literatures/UPY-C_GEN_24.pdf, Height=0.9mm, Lead Free=Yes, Material=Ceramic, Mouser Description="Multilayer Ceramic Capacitor, CC Series, 0.01 - F, - 10%, X7R, 50 V, 0603 [1608 Metric]", Octopart=https://octopart.com/cc0603krx7r9bb103-yageo-192938, RoHS=TRUE, Voltage Rating="50 V"
C15 C16: library part CMP-1659-00031-1, "Chip Capacitor, 12 pF, +/- 5%, 50 V, -55 to 125 degC, 0603 (1608 Metric), RoHS, Tape and Reel", Case\Package=Axial, Max Operating Temperature="155 degC", Min Operating Temperature="-55 degC", Package Quantity=200, Power Rating="250 mW", Resistance="475 kohm", Tolerance=1%, Voltage Rating="250 V", ComponentLink1Description="Manufacturer URL", ComponentLink1URL=http://www.yageo.com/, ComponentLink2Description=Datasheet, ComponentLink2URL=http://www.yageo.com/NewPortal/yageodocoutput?fileName=/pdf/MLCC/UPY-GP_NP0_16V-to-50V_14.pdf, DatasheetVersion="Rev. 14, 07/2016", Length="0.248 inch", Mount="Through Hole", PackageDescription="2-Pin Surface Mount Device, Body 1.6 x 0.8 mm", PackageReference=0603, Packaging=Bulk, RoHSCompliant=true
D1 D2 D3 D4 D5 D6 D7 D8 D9 D10 D11 D12 D13 D14 D15 D16 D17 D18 D19 D20 D21 D22 D23 D24 D25 D26 D27 D28 D29 D30 D31 D32 D33 D34 D35 D36 D37 D38 D39 D40 D41 D42 D43 D44 D45 D46 D47 D48 D49 D50 D51 D52 D53 D54 D55 D56 D57 D58 D59 D60 D61 D62 D63 D64 D65 D66 D67 D68 D69 D70 D71 D72 D73 D74 D75 D76 D77 D78 D79 D80 D81 D82 D83 D84: library part CMP-2000-04993-2, "DIODE GEN PURP 100V 150MA SOD123", Average Rectified Current=150mA, Capacitance=4pF, Forward Voltage=1V, Max Forward Surge Current (Ifsm)=1A, Max Operating Temperature=150°C, Max Repetitive Reverse Voltage (Vrrm)=100V, Max Reverse Leakage Current=5uA, Max Surge Current=2A, Min Operating Temperature=-65°C, Package Quantity=3000, Power Dissipation=400mW, Current Rating=150mA, Element Configuration=Single, Forward Current=150mA, Height=1.2mm, Lead Free="Lead Free", Length=2.85mm, Max Reverse Voltage (DC)=100V, Mount="Surface Mount", Number of Pins=2, Output Current=150mA, Packaging="Tape and Reel", Peak Non-Repetitive Surge Current=2A, Polarity=Standard, Radiation Hardening=No, Recovery Time=4ns, Reverse Recovery Time=4ns, Voltage Rating (DC)=100V, Width=1.8mm
J1: library part CMP-245163-000002-1, "CONN USB 2.0 TYPE-C R/A SMT", Current Rating=3/4.25/1.25/0.25A, Manufacturer=GCT, Package=0, Temperature="-40°C to +85°C", Temperature Range High=+85°C, Temperature Range Low=-40°C, Voltage Rating=20V, Automotive=No, Category=Conn, ComponentLink2Description=Datasheet, ComponentLink2URL=https://gct.co/files/drawings/usb4110.pdf, Conn Orientation="Right Angle", Contact Material=Gold,Nickel, Device Class L1=Connectors, Device Class L2="USB Connectors", Device Class L3=unset, Digikey Description="CONN USB 2.0 TYPE-C R/A SMT", Height=3.46mm, Is Female=yes, Lead Free=Yes, Manufacturer Part Number=USB4110-GF-A, Number Of Contacts=16, Octopart=https://octopart.com/usb4110-gf-a-gct-103941985, RoHS=TRUE, Shielding=true, Standoff Height=0.1mm, Usb Standard="USB 2.0"
K1 K2 K3 K4 K5 K6 K7 K8 K9 K10 K11 K12 K13 K14 K15 K16 K17 K18 K19 K20 K21 K22 K23 K24 K25 K26 K27 K28 K29 K30 K31 K32 K33 K34 K35 K36 K37 K38 K39 K40 K41 K42 K43 K44 K45 K46 K47 K48 K49 K50 K51 K52 K53 K54 K55 K56 K57 K58 K59 K60 K61 K62 K63 K64 K65 K66 K67 K68 K69 K70 K71 K72 K73 K74 K75 K76 K77 K78 K79 K80 K81 K82 K83 K84: library part CMP-006-000013-2, Design Item ID=KEYSW, Source=keyboard_parts.SchLib
R1 R2: library part CMP-2000-04091-1, Manufacturer=Yageo, Part Number=RC0603FR-075K1L
R3 R4: library part CMP-2000-06933-1, "Chip Resistor, 27 KOhm, +/- 1%, 0.1 W, -55 to 155 degC, 0603 (1608 Metric), RoHS, Tape and Reel", Case Code - in=0603, Case Code - mm=1608, Manufacturer=Yageo, Operating Temperature Range=-55Cto+155C, Package Description="2-Pin Surface Mount Device, Body 1.6 x 0.8 mm", Power Rating=100mW, Resistance=27kOhms, Temperature Coefficient=100PPM/C, Tolerance=1%, Voltage Rating=50V, Datasheet URL=http://www.yageo.com/documents/recent/PYu-RC_Group_51_RoHS_L_7.pdf, Datasheet Version="Rev. 7, 05/2017", Manufacturer URL=http://www.yageo.com/, Mounting Technology=SurfaceMount, Package Reference=0603, Packaging=Reel, Product=ThickFilmResistorsGeneralPurpose, Series=RC, Termination Style=SMD/SMT
R5 R7: library part CMP-1659-00009-5, "RES 1K OHM 1% 1/10W 0603", Case Code (Imperial)=0603, Case Code (Metric)=1608, Max Operating Temperature=155°C, Max Power Dissipation=100mW, Min Operating Temperature=-55°C, Resistance=1kR, Resistance Tolerance=1%, Resistor Type="Thick Film", Temperature Coefficient=100ppm/°C, Voltage Rating=50V, Case/Package=0603, Construction=Rectangular, Contact Plating=Tin, Depth=0.8mm, Features="Moisture Resistant", Height=0.45mm, Lead Free="Lead Free", Length=1.6mm, Military Standard=Not, Number of Terminations=2, Packaging="Tape and Reel", Power Rating=100mW, Radiation Hardening=No, REACH SVHC="No SVHC", RoHS Compliant=Yes, Series=RC, Size Code=0603, Technology="THICK FILM", Termination=SMD/SMT, Tolerance=1%
R6 R8: library part CMP-2100-03664-2, "RES 10K OHM 1% 1/10W 0603", Case Code (Imperial)=0603, Case Code (Metric)=1608, Max Operating Temperature=155°C, Max Power Dissipation=100mW, Min Operating Temperature=-55°C, Resistance=10kR, Resistance Tolerance=1%, Resistor Type="Thick Film", Temperature Coefficient=100ppm/°C, Voltage Rating=75V, Voltage Rating (DC)=50V, Case/Package=0603, Construction=Rectangular, Depth=0.8mm, Features="Moisture Resistant", Height=0.45mm, Lead Free="Lead Free", Lead Pitch=0.3mm, Length=1.6mm, Military Standard=Not, Number of Pins=2, Number of Terminations=2, Packaging="Tape and Reel", Power Rating=100mW, RoHS Compliant=Yes, Series=RC, Size Code=0603, Termination=SMD/SMT, Tolerance=1%, Weight=7.1E-05oz, Width=0.8mm
SW1 SW2: library part CMP-08834-000008-1, "SWITCH TACTILE SPST-NO 0.05A 24V", Contact Current Rating=50mA, Contact Resistance=100mR, Max Operating Temperature=70°C, Max Voltage Rating (DC)=24V, Min Operating Temperature=-25°C, Operating Force=1.57N, Package Quantity=1, Ratings=IP67, Actuator Length=0.8mm, Actuator Type=Standard, Contact Material=Bronze, Contact Plating=Silver, Current Rating=50mA, Depth=9mm, Electrical Life=500000Cycles, Height=3.65mm, Illumination Type=Non-Illuminated, Lead Free="Lead Free", Length=6.6mm, Max Current Rating=50mA, Mechanical Life=500000Cycles, Mount="Surface Mount", Number of Poles=1, Orientation=Straight, Packaging="Tape and Reel", Radiation Hardening=No, REACH SVHC="No SVHC", Switch Function=Off-Mom, Switch Travel=0.25mm, Termination="Gull Wing", Throw Configuration=SPST, Voltage Rating (DC)=24V, Weight=0.010582oz, Width=6mm
U1: "RP2040 chip for Raspberry Pi Pico - ARMÂ® CortexÂ®-M0+ MCU 32-Bit", Package=None, Availability="In Stock", Check_prices=https://www.snapeda.com/parts/RP2040/Raspberry+Pi/view-part/?ref=eda, MF="Raspberry Pi", MP=RP2040, Price=None, Purchase-URL=https://pricing.snapeda.com/search/part/RP2040/?ref=eda, SnapEDA_Link=https://www.snapeda.com/parts/RP2040/Raspberry+Pi/view-part/?ref=snap
U2: library part CMP-1679-00010-1, "Low-Dropout Positive Fixed Voltage Regulator, 1 A, 3.3 V Output Voltage, 0 to 125 degC, 4-Pin SOT-223 (318H-01), Pb-Free, Tape and Reel", Case Code (Imperial)=0603, Case Code (Metric)=1608, Max Operating Temperature="155 degC", Min Operating Temperature="-55 degC", Package Quantity=5000, Power Rating="100 mW", Resistance="220 kohm", Tolerance=1%, Type (Resistor)="Thick Film", Voltage Rating="75 V", Case\Package=0603, ComponentLink1Description="Manufacturer URL", ComponentLink1URL=http://www.onsemi.com/, ComponentLink2Description=Datasheet, ComponentLink2URL=http://www.onsemi.com/pub_link/Collateral/NCP1117-D.PDF, DatasheetVersion="Rev. 27, 09/2014", Height="0.45 mm", Length="1.55 mm", Mount="Surface Mount", PackageDescription="4-Pin Small Outline Transistor, Body 6.5 x 3.5 mm, Pitch 2.3 mm", PackageReference=SOT-223-4-318H-01_A, Packaging="Tape and Reel", Radiation Hardening=No, REACH SVHC=Unknown, RoHSCompliant=true, Weight="7.1E-05 oz", Width="0.85 mm"
U3: "128 Mbit Serial NOR Flash Memory with Dual and Quad I/O Support", Package="SOIC-8 Dialog Semiconductor", Availability=Warning, Check_prices=https://www.snapeda.com/parts/AT25SF128A-SHB-T/Dialog%20Semiconductor/view-part/5488499/?ref=eda, MF="Dialog Semiconductor", MP=AT25SF128A-SHB-T, Price=None, Purchase-URL=https://pricing.snapeda.com/search/part/AT25SF128A-SHB-T/?ref=eda, SnapEDA_Link=https://www.snapeda.com/parts/AT25SF128A-SHB-T/Dialog%20Semiconductor/view-part/5488499/?ref=snap
Y1: library part CMP-40224-000015-1, "CRYSTAL 12.000MHZ 12PF SMD", Case/Package=SMD/SMT, ESR (Equivalent Series Resistance)=100R, Frequency=12MHz, Frequency Stability=50ppm, Frequency Tolerance=20ppm, Load Capacitance=12pF, Max Operating Temperature=125°C, Min Operating Temperature=-40°C, Ratings=AEC-Q200, Height=0.031inch, Length=0.126inch, Mount="Surface Mount", Packaging="Tape and Reel", Width=0.098inch

## Nets (pads, with @x,y where several pads share a name; then routed paths per layer and width w, separated by ;. In a path a pad name is that pad's centre, name@x,y a point inside that pad or via, vN(x,y) a via of type N, cw(c..) or ccw(c..) an arc to the next point about the centre after c; other vN are vias at no path point)
+1V1: C1.1 C2.1 C3.2 U1.23 U1.45 U1.50
+3V3: C4.1 C5.1 C6.1 C7.1 C8.1 C9.1 C10.1 C11.2 C13.1 C14.1 I1.1 R6.2 R8.2 U1.1 U1.10 U1.22 U1.33 U1.42 U1.43 U1.44 U1.48 U1.49 U2.2 U2.4 U3.8
+5V: C12.1 J1.A4-B9 J1.B4-A9 U2.3
GND: C1.2 C2.2 C3.1 C4.2 C5.2 C6.2 C7.2 C8.2 C9.2 C10.2 C11.1 C12.2 C13.2 C14.2 C15.1 C16.1 I1.5 J1.1 J1.2 J1.3 J1.4 J1.A1-B12 J1.B1-A12 R1.1 R2.1 SW1.1 SW1.3 SW2.2 SW2.4 U1.19 U1.57 U2.1 U3.4 Y1.2 Y1.4
NetC15_2: C15.2 U1.20 Y1.1
NetC16_2: C16.2 R7.1 Y1.3
NetD1_1: D1.1 D2.1 D3.1 D4.1 D5.1 D6.1 D7.1 D8.1 D9.1 D10.1 D11.1 D12.1 D13.1 D14.1 D15.1 D16.1 U1.17
NetD1_2: D1.2 K1.2
NetD2_2: D2.2 K2.2
NetD3_2: D3.2 K3.2
NetD4_2: D4.2 K4.2
NetD5_2: D5.2 K5.2
NetD6_2: D6.2 K6.2
NetD7_2: D7.2 K7.2
NetD8_2: D8.2 K8.2
NetD9_2: D9.2 K9.2
NetD10_2: D10.2 K10.2
NetD11_2: D11.2 K11.2
NetD12_2: D12.2 K12.2
NetD13_2: D13.2 K13.2
NetD14_2: D14.2 K14.2
NetD15_2: D15.2 K15.2
NetD16_2: D16.2 K16.2
NetD17_1: D17.1 D18.1 D19.1 D20.1 D21.1 D22.1 D23.1 D24.1 D25.1 D26.1 D27.1 D28.1 D29.1 D30.1 D31.1 U1.16
NetD17_2: D17.2 K17.2
NetD18_2: D18.2 K18.2
NetD19_2: D19.2 K19.2
NetD20_2: D20.2 K20.2
NetD21_2: D21.2 K21.2
NetD22_2: D22.2 K22.2
NetD23_2: D23.2 K23.2
NetD24_2: D24.2 K24.2
NetD25_2: D25.2 K25.2
NetD26_2: D26.2 K26.2
NetD27_2: D27.2 K27.2
NetD28_2: D28.2 K28.2
NetD29_2: D29.2 K29.2
NetD30_2: D30.2 K30.2
NetD31_2: D31.2 K31.2
NetD32_1: D32.1 D33.1 D34.1 D35.1 D36.1 D37.1 D38.1 D39.1 D40.1 D41.1 D42.1 D43.1 D44.1 D45.1 D46.1 U1.15
NetD32_2: D32.2 K32.2
NetD33_2: D33.2 K33.2
NetD34_2: D34.2 K34.2
NetD35_2: D35.2 K35.2
NetD36_2: D36.2 K36.2
NetD37_2: D37.2 K37.2
NetD38_2: D38.2 K38.2
NetD39_2: D39.2 K39.2
NetD40_2: D40.2 K40.2
NetD41_2: D41.2 K41.2
NetD42_2: D42.2 K42.2
NetD43_2: D43.2 K43.2
NetD44_2: D44.2 K44.2
NetD45_2: D45.2 K45.2
NetD46_2: D46.2 K46.2
NetD47_1: D47.1 D48.1 D49.1 D50.1 D51.1 D52.1 D53.1 D54.1 D55.1 D56.1 D57.1 D58.1 D59.1 D60.1 U1.14
NetD47_2: D47.2 K47.2
NetD48_2: D48.2 K48.2
NetD49_2: D49.2 K49.2
NetD50_2: D50.2 K50.2
NetD51_2: D51.2 K51.2
NetD52_2: D52.2 K52.2
NetD53_2: D53.2 K53.2
NetD54_2: D54.2 K54.2
NetD55_2: D55.2 K55.2
NetD56_2: D56.2 K56.2
NetD57_2: D57.2 K57.2
NetD58_2: D58.2 K58.2
NetD59_2: D59.2 K59.2
NetD60_2: D60.2 K60.2
NetD61_1: D61.1 D62.1 D63.1 D64.1 D65.1 D66.1 D67.1 D68.1 D69.1 D70.1 D71.1 D72.1 D73.1 D74.1 U1.13
NetD61_2: D61.2 K61.2
NetD62_2: D62.2 K62.2
NetD63_2: D63.2 K63.2
NetD64_2: D64.2 K64.2
NetD65_2: D65.2 K65.2
NetD66_2: D66.2 K66.2
NetD67_2: D67.2 K67.2
NetD68_2: D68.2 K68.2
NetD69_2: D69.2 K69.2
NetD70_2: D70.2 K70.2
NetD71_2: D71.2 K71.2
NetD72_2: D72.2 K72.2
NetD73_2: D73.2 K73.2
NetD74_2: D74.2 K74.2
NetD75_1: D75.1 D76.1 D77.1 D78.1 D79.1 D80.1 D81.1 D82.1 D83.1 D84.1 U1.12
NetD75_2: D75.2 K75.2
NetD76_2: D76.2 K76.2
NetD77_2: D77.2 K77.2
NetD78_2: D78.2 K78.2
NetD79_2: D79.2 K79.2
NetD80_2: D80.2 K80.2
NetD81_2: D81.2 K81.2
NetD82_2: D82.2 K82.2
NetD83_2: D83.2 K83.2
NetD84_2: D84.2 K84.2
NetI1_2: I1.2 U1.25
NetJ1_A5: J1.A5 R2.2
NetJ1_A6: J1.A6 J1.B6 R4.2
NetJ1_A7: J1.A7 J1.B7 R3.2
NetJ1_B5: J1.B5 R1.2
NetK1_1: K1.1 K17.1 K32.1 K47.1 K61.1 K75.1 U1.29
NetK2_1: K2.1 K18.1 K33.1 K48.1 K76.1 U1.30
NetK3_1: K3.1 K19.1 K34.1 K49.1 K62.1 K77.1 U1.31
NetK4_1: K4.1 K20.1 K35.1 K50.1 K63.1 U1.32
NetK5_1: K5.1 K21.1 K36.1 K51.1 K64.1 U1.34
NetK6_1: K6.1 K22.1 K37.1 K52.1 K65.1 U1.35
NetK7_1: K7.1 K23.1 K38.1 K53.1 K66.1 K78.1 U1.36
NetK8_1: K8.1 K24.1 K39.1 K54.1 K67.1 U1.37
NetK9_1: K9.1 K25.1 K40.1 K55.1 K68.1 U1.2
NetK10_1: K10.1 K26.1 K41.1 K56.1 K69.1 U1.3
NetK11_1: K11.1 K27.1 K42.1 K57.1 K70.1 K79.1 U1.4
NetK12_1: K12.1 K28.1 K43.1 K58.1 K71.1 K80.1 U1.5
NetK13_1: K13.1 K29.1 K44.1 K81.1 U1.6
NetK14_1: K14.1 K45.1 K59.1 K72.1 K82.1 U1.7
NetK15_1: K15.1 K30.1 K73.1 K83.1 U1.8
NetK16_1: K16.1 K31.1 K46.1 K60.1 K74.1 K84.1 U1.9
NetR3_1: R3.1 U1.46
NetR4_1: R4.1 U1.47
NetR5_1: R5.1 R6.1 U1.56 U3.1
NetR5_2: R5.2 SW1.2 SW1.4
NetR7_2: R7.2 U1.21
NetR8_1: R8.1 SW2.1 SW2.3 U1.26
NetU1_51: U1.51 U3.7
NetU1_52: U1.52 U3.6
NetU1_53: U1.53 U3.5
NetU1_54: U1.54 U3.3
NetU1_55: U1.55 U3.2
pads on no net: I1.3 I1.4 I1.6 I1.A I1.B I1.C I1.D I1.E I1.F I1.G J1. J1.A8 J1.B8 K1.Un1 K1.Un2 K1.Un3 K2.Un1 K2.Un2 K2.Un3 K3.Un1 K3.Un2 K3.Un3 K4.Un1 K4.Un2 K4.Un3 K5.Un1 K5.Un2 K5.Un3 K6.Un1 K6.Un2 K6.Un3 K7.Un1 K7.Un2 K7.Un3 K8.Un1 K8.Un2 K8.Un3 K9.Un1 K9.Un2 K9.Un3 K10.Un1 K10.Un2 K10.Un3 K11.Un1 K11.Un2 K11.Un3 K12.Un1 K12.Un2 K12.Un3 K13.Un1 K13.Un2 K13.Un3 K14.Un1 K14.Un2 K14.Un3 K15.Un1 K15.Un2 K15.Un3 K16.Un1 K16.Un2 K16.Un3 K17.Un1 K17.Un2 K17.Un3 K18.Un1 K18.Un2 K18.Un3 K19.Un1 K19.Un2 K19.Un3 K20.Un1 K20.Un2 K20.Un3 K21.Un1 K21.Un2 K21.Un3 K22.Un1 K22.Un2 K22.Un3 K23.Un1 K23.Un2 K23.Un3 K24.Un1 K24.Un2 K24.Un3 K25.Un1 K25.Un2 K25.Un3 K26.Un1 K26.Un2 K26.Un3 K27.Un1 K27.Un2 K27.Un3 K28.Un1 K28.Un2 K28.Un3 K29.Un1 K29.Un2 K29.Un3 K30.Un1 K30.Un2 K30.Un3 K30.Un4 K30.Un5 K30.Un6 K30.Un7 K31.Un1 K31.Un2 K31.Un3 K32.Un1 K32.Un2 K32.Un3 K33.Un1 K33.Un2 K33.Un3 K34.Un1 K34.Un2 K34.Un3 K35.Un1 K35.Un2 K35.Un3 K36.Un1 K36.Un2 K36.Un3 K37.Un1 K37.Un2 K37.Un3 K38.Un1 K38.Un2 K38.Un3 K39.Un1 K39.Un2 K39.Un3 K40.Un1 K40.Un2 K40.Un3 K41.Un1 K41.Un2 K41.Un3 K42.Un1 K42.Un2 K42.Un3 K43.Un1 K43.Un2 K43.Un3 K44.Un1 K44.Un2 K44.Un3 K45.Un1 K45.Un2 K45.Un3 K46.Un1 K46.Un2 K46.Un3 K47.Un1 K47.Un2 K47.Un3 K48.Un1 K48.Un2 K48.Un3 K49.Un1 K49.Un2 K49.Un3 K50.Un1 K50.Un2 K50.Un3 K51.Un1 K51.Un2 K51.Un3 K52.Un1 K52.Un2 K52.Un3 K53.Un1 K53.Un2 K53.Un3 K54.Un1 K54.Un2 K54.Un3 K55.Un1 K55.Un2 K55.Un3 K56.Un1 K56.Un2 K56.Un3 K57.Un1 K57.Un2 K57.Un3 K58.Un1 K58.Un2 K58.Un3 K59.Un1 K59.Un2 K59.Un3 K59.Un4 K59.Un5 K59.Un6 K59.Un7 K60.Un1 K60.Un2 K60.Un3 K61.Un1 K61.Un2 K61.Un3 K61.Un4 K61.Un5 K61.Un6 K61.Un7 K62.Un1 K62.Un2 K62.Un3 K63.Un1 K63.Un2 K63.Un3 K64.Un1 K64.Un2 K64.Un3 K65.Un1 K65.Un2 K65.Un3 K66.Un1 K66.Un2 K66.Un3 K67.Un1 K67.Un2 K67.Un3 K68.Un1 K68.Un2 K68.Un3 K69.Un1 K69.Un2 K69.Un3 K70.Un1 K70.Un2 K70.Un3 K71.Un1 K71.Un2 K71.Un3 K72.Un1 K72.Un2 K72.Un3 K73.Un1 K73.Un2 K73.Un3 K74.Un1 K74.Un2 K74.Un3 K75.Un1 K75.Un2 K75.Un3 K76.Un1 K76.Un2 K76.Un3 K77.Un1 K77.Un2 K77.Un3 K78.Un1 K78.Un2 K78.Un3 K78.Un4 K78.Un5 K78.Un6 K78.Un7 K79.Un1 K79.Un2 K79.Un3 K80.Un1 K80.Un2 K80.Un3 K81.Un1 K81.Un2 K81.Un3 K82.Un1 K82.Un2 K82.Un3 K83.Un1 K83.Un2 K83.Un3 K84.Un1 K84.Un2 K84.Un3 U1.11 U1.18 U1.24 U1.27 U1.28 U1.38 U1.39 U1.40 U1.41

## Silkscreen, mask and mechanical layers (free items; w line width, h text height)
Mechanical 1:
  the board outline again, w0.254